# Altium PCB STM32F302VC_EVM.PcbDoc (part 17 of 19)
Units mil, origin at the board's own origin, x right, y up, seen from the top; angles counter-clockwise.
Board outline 3937.01 x 3937.01 mil, 2 copper layers (Top Layer, Bottom Layer); 117 components, 166 nets, 602 pads, 373 vias.
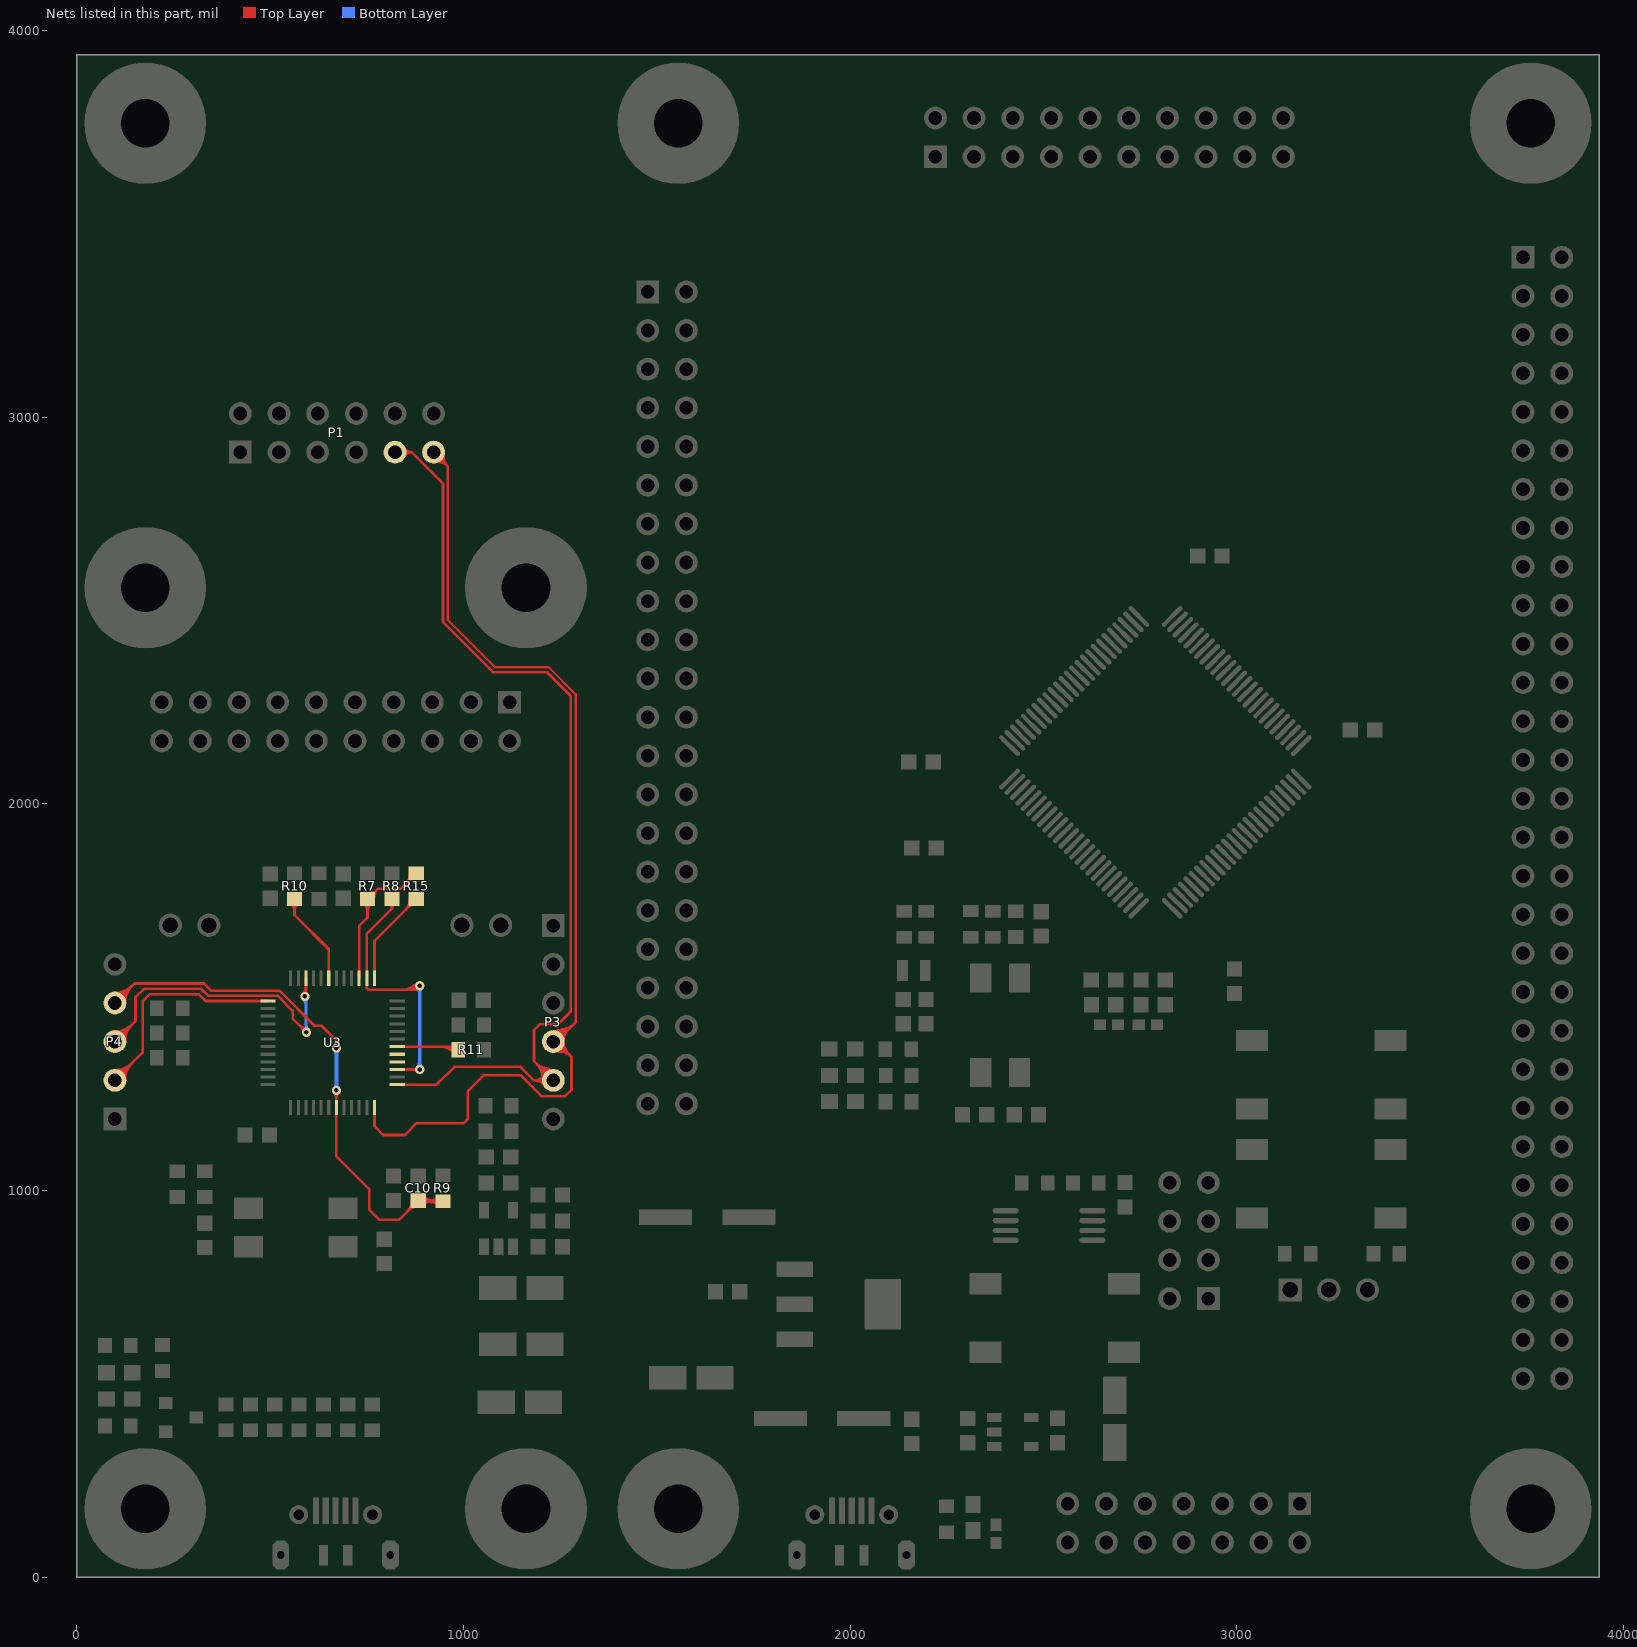
[diagram p17: the nets of this part, all layers, seen from the top]

## Via types
v1: diameter 23.62, hole 11.81, Top Layer to Bottom Layer, tented both sides, 372 vias
v2: diameter 50, hole 28, Top Layer to Bottom Layer, tented both sides, 1 vias

## Nets (pads, with @x,y where several pads share a name; then routed paths per layer and width w, separated by ;. In a path a pad name is that pad's centre, name@x,y a point inside that pad or via, vN(x,y) a via of type N, cw(c..) or ccw(c..) an arc to the next point about the centre after c; other vN are vias at no path point) (continued)
STLK_RX: P1.9 P3.5 U3.13 | length 4046.1
  Top Layer w7: P1.9@822.83,2909.45 865.83,2909.45 ; U3.13@828.74,1273.62 930.12,1273.62 976.38,1319.88 1147.64,1319.88 1182.48,1285.04 ; P1.9@839.69,2900.63 cw(c854.26,2893.01) 854.26,2909.45 ; P1.9@839.69,2900.63 cw(c854.26,2893.01) 854.26,2909.45 ; P1.9@839.69,2900.63 cw(c854.26,2893.01) 854.26,2909.45 ; P1.9@839.69,2918.27 ccw(c854.26,2925.89) 854.26,2909.45 ; P1.9@839.69,2918.27 ccw(c854.26,2925.89) 854.26,2909.45 ; P1.9@839.69,2918.27 ccw(c854.26,2925.89) 854.26,2909.45 ; P1.9@845.9,2897.38 cw(c865.83,2886.96) 865.83,2909.45 ; P1.9@845.9,2897.38 cw(c865.83,2886.96) 865.83,2909.45 ; P1.9@845.9,2897.38 cw(c865.83,2886.96) 865.83,2909.45 ; P1.9@845.9,2921.51 ccw(c865.83,2931.94) 865.83,2909.45 ; P1.9@845.9,2921.51 ccw(c865.83,2931.94) 865.83,2909.45 ; P1.9@845.9,2921.51 ccw(c865.83,2931.94) 865.83,2909.45 ; 865.83,2909.45 946.85,2828.43 946.85,2470.22 1076.52,2340.55 1215.3,2340.55 1277.4,2278.45 1277.4,1462.44 1245.08,1430.12 1197.83,1430.12 1182.28,1414.57 1182.28,1335.04 P3.5@1232.28,1285.04 1182.48,1285.04 ; 1182.48,1285.04 cw(c1182.48,1250.41) P3.5@1210.91,1270.18 ; 1182.48,1285.04 ccw(c1182.48,1319.67) P3.5@1210.91,1299.9 ; 1182.48,1285.04 ccw(c1182.48,1319.67) P3.5@1210.91,1299.9 ; 1182.48,1285.04 cw(c1182.48,1250.41) P3.5@1210.91,1270.18 ; 1182.48,1285.04 ccw(c1182.48,1319.67) P3.5@1210.91,1299.9 ; 1182.48,1285.04 cw(c1182.48,1250.41) P3.5@1210.91,1270.18 ; 1187.85,1329.47 cw(c1143.42,1285.04) P3.5@1206.26,1285.04 ; 1187.85,1329.47 ccw(c1232.28,1373.9) P3.5@1232.28,1311.07 ; 1187.85,1329.47 ccw(c1232.28,1373.9) P3.5@1232.28,1311.07 ; 1187.85,1329.47 cw(c1143.42,1285.04) P3.5@1206.26,1285.04 ; 1187.85,1329.47 ccw(c1232.28,1373.9) P3.5@1232.28,1311.07 ; 1187.85,1329.47 cw(c1143.42,1285.04) P3.5@1206.26,1285.04 ; 1195.88,1285.04 cw(c1195.88,1259.72) P3.5@1216.66,1274.18 ; 1195.88,1285.04 ccw(c1195.88,1310.36) P3.5@1216.66,1295.9 ; 1195.88,1285.04 ccw(c1195.88,1310.36) P3.5@1216.66,1295.9 ; 1195.88,1285.04 cw(c1195.88,1259.72) P3.5@1216.66,1274.18 ; 1195.88,1285.04 ccw(c1195.88,1310.36) P3.5@1216.66,1295.9 ; 1195.88,1285.04 cw(c1195.88,1259.72) P3.5@1216.66,1274.18 ; 1199.8,1317.52 cw(c1167.32,1285.04) P3.5@1213.26,1285.04 ; 1199.8,1317.52 ccw(c1232.28,1350) P3.5@1232.28,1304.07 ; 1199.8,1317.52 ccw(c1232.28,1350) P3.5@1232.28,1304.07 ; 1199.8,1317.52 cw(c1167.32,1285.04) P3.5@1213.26,1285.04 ; 1199.8,1317.52 ccw(c1232.28,1350) P3.5@1232.28,1304.07 ; 1199.8,1317.52 cw(c1167.32,1285.04) P3.5@1213.26,1285.04 ; 1202.58,1319.03 cw(c1191.21,1276.63) P3.5@1234.22,1285.44 ; 1202.58,1319.03 cw(c1191.21,1276.63) P3.5@1234.22,1285.44 ; 1202.58,1319.03 cw(c1191.21,1276.63) P3.5@1234.22,1285.44 ; 1206.22,1311.05 cw(c1198.86,1283.59) P3.5@1227.26,1284.82 ; 1206.22,1311.05 cw(c1198.86,1283.59) P3.5@1227.26,1284.82 ; 1206.22,1311.05 cw(c1198.86,1283.59) P3.5@1227.26,1284.82 ; 1206.27,1311.1 ccw(c1233.73,1318.46) P3.5@1232.5,1290.06 ; 1206.27,1311.1 ccw(c1233.73,1318.46) P3.5@1232.5,1290.06 ; 1206.27,1311.1 ccw(c1233.73,1318.46) P3.5@1232.5,1290.06 ; 1213.52,1316.1 cw(c1203.62,1279.17) P3.5@1241.07,1286.84 ; 1213.52,1316.1 cw(c1203.62,1279.17) P3.5@1241.07,1286.84 ; 1213.52,1316.1 cw(c1203.62,1279.17) P3.5@1241.07,1286.84
STLK_TX: P1.11 P3.4 U3.12 | length 5361.9
  Top Layer w6: P1.11@922.83,2909.45 959.35,2872.94 ; P3.4@1232.28,1385.04 1240.16,1385.04 1289.9,1434.78 ; P1.11@910.88,2899.63 ccw(c949.62,2931.44) 944.72,2881.55 ; P1.11@910.88,2899.63 ccw(c949.62,2931.44) 944.72,2881.55 ; P1.11@910.88,2899.63 ccw(c949.62,2931.44) 944.72,2881.55 ; P1.11@926.18,2889.2 cw(c930.85,2860.96) 951.09,2881.2 ; P1.11@926.18,2889.2 cw(c930.85,2860.96) 951.09,2881.2 ; P1.11@926.18,2889.2 cw(c930.85,2860.96) 951.09,2881.2 ; P1.11@927.16,2883.28 cw(c933.19,2846.78) 959.35,2872.94 ; P1.11@927.16,2883.28 cw(c933.19,2846.78) 959.35,2872.94 ; P1.11@927.16,2883.28 cw(c933.19,2846.78) 959.35,2872.94 ; P1.11@932.65,2921.41 cw(c900.84,2882.66) 950.73,2887.57 ; P1.11@932.65,2921.41 cw(c900.84,2882.66) 950.73,2887.57 ; P1.11@932.65,2921.41 cw(c900.84,2882.66) 950.73,2887.57 ; P1.11@943.09,2906.1 ccw(c971.33,2901.43) 951.09,2881.2 ; P1.11@943.09,2906.1 ccw(c971.33,2901.43) 951.09,2881.2 ; P1.11@943.09,2906.1 ccw(c971.33,2901.43) 951.09,2881.2 ; P1.11@949.01,2905.12 ccw(c985.5,2899.09) 959.35,2872.94 ; P1.11@949.01,2905.12 ccw(c985.5,2899.09) 959.35,2872.94 ; P1.11@949.01,2905.12 ccw(c985.5,2899.09) 959.35,2872.94 ; 959.35,2872.94 959.35,2475.4 1081.7,2353.05 1220.48,2353.05 1289.9,2283.63 1289.9,1434.78 ; P3.4@1217.62,1389.96 cw(c1253.22,1378.01) 1244.04,1414.43 ; P3.4@1217.62,1389.96 cw(c1253.22,1378.01) 1244.04,1414.43 ; P3.4@1217.62,1389.96 cw(c1253.22,1378.01) 1244.04,1414.43 ; P3.4@1223.3,1388.05 cw(c1265.59,1373.86) 1254.69,1417.11 ; P3.4@1223.3,1388.05 cw(c1265.59,1373.86) 1254.69,1417.11 ; P3.4@1223.3,1388.05 cw(c1265.59,1373.86) 1254.69,1417.11 ; P3.4@1228.9,1385.83 cw(c1261.67,1378.21) 1253.44,1410.83 ; P3.4@1228.9,1385.83 cw(c1261.67,1378.21) 1253.44,1410.83 ; P3.4@1228.9,1385.83 cw(c1261.67,1378.21) 1253.44,1410.83 ; P3.4@1228.99,1386.14 cw(c1277.97,1369.7) 1265.34,1419.8 ; P3.4@1228.99,1386.14 cw(c1277.97,1369.7) 1265.34,1419.8 ; P3.4@1228.99,1386.14 cw(c1277.97,1369.7) 1265.34,1419.8 ; P3.4@1232.41,1393.57 ccw(c1232.96,1431.5) 1259.79,1404.67 ; P3.4@1232.41,1393.57 ccw(c1232.96,1431.5) 1259.79,1404.67 ; P3.4@1232.41,1393.57 ccw(c1232.96,1431.5) 1259.79,1404.67 ; P3.4@1232.5,1399.57 ccw(c1233.25,1451.28) 1269.83,1414.71 ; P3.4@1232.5,1399.57 ccw(c1233.25,1451.28) 1269.83,1414.71 ; P3.4@1232.5,1399.57 ccw(c1233.25,1451.28) 1269.83,1414.71 ; P3.4@1232.58,1405.56 ccw(c1233.54,1471.06) 1279.86,1424.74 ; P3.4@1232.58,1405.56 ccw(c1233.54,1471.06) 1279.86,1424.74 ; P3.4@1232.58,1405.56 ccw(c1233.54,1471.06) 1279.86,1424.74 ; P3.4@1232.67,1411.56 ccw(c1233.83,1490.84) 1289.89,1434.78 ; P3.4@1232.67,1411.56 ccw(c1233.83,1490.84) 1289.89,1434.78 ; P3.4@1232.67,1411.56 ccw(c1233.83,1490.84) 1289.89,1434.78 ; P3.4@1234.75,1384.47 cw(c1272.44,1375.7) 1262.98,1413.23 ; P3.4@1234.75,1384.47 cw(c1272.44,1375.7) 1262.98,1413.23 ; P3.4@1234.75,1384.47 cw(c1272.44,1375.7) 1262.98,1413.23 ; P3.4@1240.78,1384.36 cw(c1265.4,1382.4) 1259.36,1406.34 ; P3.4@1240.78,1384.36 cw(c1265.4,1382.4) 1259.36,1406.34 ; P3.4@1240.78,1384.36 cw(c1265.4,1382.4) 1259.36,1406.34 ; P3.4@1245.88,1407.82 ccw(c1254.15,1421.67) 1258.1,1406.02 ; P3.4@1245.88,1407.82 ccw(c1254.15,1421.67) 1258.1,1406.02 ; P3.4@1245.88,1407.82 ccw(c1254.15,1421.67) 1258.1,1406.02 ; P3.4@1252.81,1385.04 cw(c1283.36,1385.04) 1261.76,1406.64 ; P3.4@1252.81,1385.04 cw(c1283.36,1385.04) 1261.76,1406.64 ; P3.4@1252.81,1385.04 cw(c1283.36,1385.04) 1261.76,1406.64 ; P3.4@1258.81,1385.04 cw(c1303.84,1385.04) 1272,1416.88 ; P3.4@1258.81,1385.04 cw(c1303.84,1385.04) 1272,1416.88 ; P3.4@1258.81,1385.04 cw(c1303.84,1385.04) 1272,1416.88
  Top Layer w7: U3.12@769.68,1214.57 769.68,1166.34 792.32,1143.7 848.43,1143.7 878.94,1174.21 1000.98,1174.21 1010.83,1184.06 1010.83,1255.91 1053.15,1298.23 1147.64,1298.23 1201.77,1244.09 1262.8,1244.09 1279.19,1260.48 1279.19,1346.01 ; P3.4@1240.16,1385.04 1279.19,1346.01 ; P3.4@1220.04,1374.78 ccw(c1256.28,1405.14) 1252.12,1358.05 ; P3.4@1220.04,1374.78 ccw(c1256.28,1405.14) 1252.12,1358.05 ; P3.4@1220.04,1374.78 ccw(c1256.28,1405.14) 1252.12,1358.05 ; P3.4@1234.36,1373.19 cw(c1239.43,1344.33) 1260.15,1365.05 ; P3.4@1234.36,1373.19 cw(c1239.43,1344.33) 1260.15,1365.05 ; P3.4@1234.36,1373.19 cw(c1239.43,1344.33) 1260.15,1365.05 ; P3.4@1235.57,1366.3 cw(c1242.27,1328.13) 1269.66,1355.53 ; P3.4@1235.57,1366.3 cw(c1242.27,1328.13) 1269.66,1355.53 ; P3.4@1235.57,1366.3 cw(c1242.27,1328.13) 1269.66,1355.53 ; P3.4@1236.78,1359.4 cw(c1245.11,1311.94) 1279.18,1346.01 ; P3.4@1236.78,1359.4 cw(c1245.11,1311.94) 1279.18,1346.01 ; P3.4@1236.78,1359.4 cw(c1245.11,1311.94) 1279.18,1346.01 ; P3.4@1251.31,1385.04 ccw(c1278.24,1385.04) 1259.2,1366 ; P3.4@1251.31,1385.04 ccw(c1278.24,1385.04) 1259.2,1366 ; P3.4@1251.31,1385.04 ccw(c1278.24,1385.04) 1259.2,1366 ; P3.4@1258.31,1385.04 ccw(c1302.14,1385.04) 1271.15,1354.05 ; P3.4@1258.31,1385.04 ccw(c1302.14,1385.04) 1271.15,1354.05 ; P3.4@1258.31,1385.04 ccw(c1302.14,1385.04) 1271.15,1354.05
STM_JTCK: P4.2 U3.37 | length 1300.8
  Top Layer w7: P4.2@98.43,1285.04 170.28,1356.89 170.28,1488.56 189.46,1507.75 314.96,1507.75 332.55,1490.16 U3.37@494.09,1490.16 ; P4.2@98.21,1290.06 ccw(c96.98,1318.46) 124.44,1311.1 ; P4.2@98.21,1290.06 ccw(c96.98,1318.46) 124.44,1311.1 ; P4.2@98.21,1290.06 ccw(c96.98,1318.46) 124.44,1311.1 ; P4.2@98.43,1304.07 ccw(c98.43,1350) 130.91,1317.52 ; P4.2@98.43,1304.07 ccw(c98.43,1350) 130.91,1317.52 ; P4.2@98.43,1304.07 ccw(c98.43,1350) 130.91,1317.52 ; P4.2@98.43,1311.07 ccw(c98.43,1373.9) 142.86,1329.47 ; P4.2@98.43,1311.07 ccw(c98.43,1373.9) 142.86,1329.47 ; P4.2@98.43,1311.07 ccw(c98.43,1373.9) 142.86,1329.47 ; P4.2@103.45,1284.82 cw(c131.85,1283.59) 124.49,1311.05 ; P4.2@103.45,1284.82 cw(c131.85,1283.59) 124.49,1311.05 ; P4.2@103.45,1284.82 cw(c131.85,1283.59) 124.49,1311.05 ; P4.2@117.45,1285.04 cw(c163.39,1285.04) 130.91,1317.52 ; P4.2@117.45,1285.04 cw(c163.39,1285.04) 130.91,1317.52 ; P4.2@117.45,1285.04 cw(c163.39,1285.04) 130.91,1317.52 ; P4.2@124.45,1285.04 cw(c187.29,1285.04) 142.86,1329.47 ; P4.2@124.45,1285.04 cw(c187.29,1285.04) 142.86,1329.47 ; P4.2@124.45,1285.04 cw(c187.29,1285.04) 142.86,1329.47
STM_JTMS: P4.3 U3.34 | length 1999.2
  Top Layer w7: P4.3@98.43,1385.04 151.57,1438.19 151.57,1500 173.23,1521.65 321.85,1521.65 339.57,1503.94 518.7,1503.94 558.07,1464.57 558.07,1445.25 v1(593.87,1409.45) ; v1(589.99,1501.89) 590.47,1501.89 592.52,1503.94 U3.34@592.52,1549.21 ; P4.3@98.21,1390.06 ccw(c96.98,1418.46) 124.44,1411.1 ; P4.3@98.21,1390.06 ccw(c96.98,1418.46) 124.44,1411.1 ; P4.3@98.21,1390.06 ccw(c96.98,1418.46) 124.44,1411.1 ; P4.3@98.43,1404.07 ccw(c98.43,1450) 130.91,1417.52 ; P4.3@98.43,1404.07 ccw(c98.43,1450) 130.91,1417.52 ; P4.3@98.43,1404.07 ccw(c98.43,1450) 130.91,1417.52 ; P4.3@98.43,1411.07 ccw(c98.43,1473.9) 142.86,1429.47 ; P4.3@98.43,1411.07 ccw(c98.43,1473.9) 142.86,1429.47 ; P4.3@98.43,1411.07 ccw(c98.43,1473.9) 142.86,1429.47 ; P4.3@103.45,1384.82 cw(c131.85,1383.59) 124.49,1411.05 ; P4.3@103.45,1384.82 cw(c131.85,1383.59) 124.49,1411.05 ; P4.3@103.45,1384.82 cw(c131.85,1383.59) 124.49,1411.05 ; P4.3@117.45,1385.04 cw(c163.39,1385.04) 130.91,1417.52 ; P4.3@117.45,1385.04 cw(c163.39,1385.04) 130.91,1417.52 ; P4.3@117.45,1385.04 cw(c163.39,1385.04) 130.91,1417.52 ; P4.3@124.45,1385.04 cw(c187.29,1385.04) 142.86,1429.47 ; P4.3@124.45,1385.04 cw(c187.29,1385.04) 142.86,1429.47 ; P4.3@124.45,1385.04 cw(c187.29,1385.04) 142.86,1429.47 ; 579.68,1423.64 cw(c565.49,1409.45) v1@585.56,1409.45 ; 579.68,1423.64 ccw(c593.87,1437.82) v1@593.87,1417.76 ; 579.68,1423.64 ccw(c593.87,1437.82) v1@593.87,1417.76 ; 579.68,1423.64 cw(c565.49,1409.45) v1@585.56,1409.45 ; 579.68,1423.64 ccw(c593.87,1437.82) v1@593.87,1417.76 ; 579.68,1423.64 cw(c565.49,1409.45) v1@585.56,1409.45 ; 581.35,1421.11 cw(c577.31,1406.06) v1@592.58,1409.19 ; 581.35,1421.11 cw(c577.31,1406.06) v1@592.58,1409.19 ; 581.35,1421.11 cw(c577.31,1406.06) v1@592.58,1409.19 ; 582.2,1421.97 ccw(c597.26,1426) v1@594.13,1410.73 ; 582.2,1421.97 ccw(c597.26,1426) v1@594.13,1410.73 ; 582.2,1421.97 ccw(c597.26,1426) v1@594.13,1410.73 ; v1@584.11,1507.77 ccw(c563.8,1528.07) 592.52,1528.07 ; v1@584.11,1507.77 ccw(c563.8,1528.07) 592.52,1528.07 ; v1@584.11,1507.77 ccw(c563.8,1528.07) 592.52,1528.07 ; 592.52,1515.84 ccw(c603.93,1515.84) v1@595.86,1507.77 ; 592.52,1515.84 ccw(c603.93,1515.84) v1@595.86,1507.77 ; 592.52,1515.84 ccw(c603.93,1515.84) v1@595.86,1507.77
  Bottom Layer w7: v1(589.99,1501.89) 590.47,1501.89 592.52,1499.84 592.52,1410.8 v1(593.87,1409.45) ; v1@584.11,1496.01 cw(c563.8,1475.71) 592.52,1475.71 ; v1@584.11,1496.01 cw(c563.8,1475.71) 592.52,1475.71 ; v1@584.11,1496.01 cw(c563.8,1475.71) 592.52,1475.71 ; v1@587.99,1415.33 ccw(c577.06,1426.26) 592.52,1426.26 ; v1@587.99,1415.33 ccw(c577.06,1426.26) 592.52,1426.26 ; v1@587.99,1415.33 ccw(c577.06,1426.26) 592.52,1426.26 ; 592.52,1432.77 ccw(c617.19,1432.77) v1@599.75,1415.33 ; 592.52,1432.77 ccw(c617.19,1432.77) v1@599.75,1415.33 ; 592.52,1432.77 ccw(c617.19,1432.77) v1@599.75,1415.33 ; 592.52,1487.94 cw(c603.93,1487.94) v1@595.86,1496.01 ; 592.52,1487.94 cw(c603.93,1487.94) v1@595.86,1496.01 ; 592.52,1487.94 cw(c603.93,1487.94) v1@595.86,1496.01
STM_RST: C10.2 P4.4 R9.1 U3.7 | length 3020.8
  Top Layer w7: P4.4@98.43,1485.04 149.02,1535.63 328.54,1535.63 347.24,1516.94 524.4,1516.94 615.16,1426.18 632.87,1426.18 671.26,1387.8 ; v1(671.26,1258.86) U3.7@671.26,1214.57 671.26,1088.46 755.91,1003.81 755.91,950.79 782.48,924.21 832.68,924.21 C10.2@882.87,974.41 ; v1(671.26,1368.11) 671.26,1387.8 ; P4.4@98.21,1490.06 ccw(c96.98,1518.46) 124.44,1511.1 ; P4.4@98.21,1490.06 ccw(c96.98,1518.46) 124.44,1511.1 ; P4.4@98.21,1490.06 ccw(c96.98,1518.46) 124.44,1511.1 ; P4.4@98.43,1504.07 ccw(c98.43,1550) 130.91,1517.52 ; P4.4@98.43,1504.07 ccw(c98.43,1550) 130.91,1517.52 ; P4.4@98.43,1504.07 ccw(c98.43,1550) 130.91,1517.52 ; P4.4@98.43,1511.07 ccw(c98.43,1573.9) 142.86,1529.47 ; P4.4@98.43,1511.07 ccw(c98.43,1573.9) 142.86,1529.47 ; P4.4@98.43,1511.07 ccw(c98.43,1573.9) 142.86,1529.47 ; P4.4@103.45,1484.82 cw(c131.85,1483.59) 124.49,1511.05 ; P4.4@103.45,1484.82 cw(c131.85,1483.59) 124.49,1511.05 ; P4.4@103.45,1484.82 cw(c131.85,1483.59) 124.49,1511.05 ; P4.4@117.45,1485.04 cw(c163.39,1485.04) 130.91,1517.52 ; P4.4@117.45,1485.04 cw(c163.39,1485.04) 130.91,1517.52 ; P4.4@117.45,1485.04 cw(c163.39,1485.04) 130.91,1517.52 ; P4.4@124.45,1485.04 cw(c187.29,1485.04) 142.86,1529.47 ; P4.4@124.45,1485.04 cw(c187.29,1485.04) 142.86,1529.47 ; P4.4@124.45,1485.04 cw(c187.29,1485.04) 142.86,1529.47 ; v1@665.38,1252.98 cw(c651.2,1238.79) 671.26,1238.79 ; v1@665.38,1252.98 cw(c651.2,1238.79) 671.26,1238.79 ; v1@665.38,1252.98 cw(c651.2,1238.79) 671.26,1238.79 ; v1@665.46,1374.07 ccw(c652.11,1387.79) 671.26,1387.79 ; v1@665.46,1374.07 ccw(c652.11,1387.79) 671.26,1387.79 ; v1@665.46,1374.07 ccw(c652.11,1387.79) 671.26,1387.79 ; 671.26,1238.79 cw(c691.32,1238.79) v1@677.14,1252.98 ; 671.26,1238.79 cw(c691.32,1238.79) v1@677.14,1252.98 ; 671.26,1238.79 cw(c691.32,1238.79) v1@677.14,1252.98 ; 671.26,1387.79 ccw(c690.41,1387.79) v1@677.06,1374.07 ; 671.26,1387.79 ccw(c690.41,1387.79) v1@677.06,1374.07 ; 671.26,1387.79 ccw(c690.41,1387.79) v1@677.06,1374.07 ; 855.24,946.78 cw(c882.87,919.15) C10.2@882.87,958.22 ; 855.24,946.78 ccw(c827.62,974.41) C10.2@866.69,974.41 ; 855.24,946.78 ccw(c827.62,974.41) C10.2@866.69,974.41 ; 855.24,946.78 cw(c882.87,919.15) C10.2@882.87,958.22 ; 855.24,946.78 ccw(c827.62,974.41) C10.2@866.69,974.41 ; 855.24,946.78 cw(c882.87,919.15) C10.2@882.87,958.22 ; C10.2@867.19,958.73 cw(c882.87,943.05) C10.2@882.87,965.22 ; C10.2@867.19,958.73 ccw(c851.51,974.41) C10.2@873.69,974.41 ; C10.2@867.19,958.73 ccw(c851.51,974.41) C10.2@873.69,974.41 ; C10.2@867.19,958.73 cw(c882.87,943.05) C10.2@882.87,965.22 ; C10.2@867.19,958.73 ccw(c851.51,974.41) C10.2@873.69,974.41 ; C10.2@867.19,958.73 cw(c882.87,943.05) C10.2@882.87,965.22
  Top Layer w10: C10.2@882.87,974.41 884.84,972.44 R9.1@946.85,972.44 ; C10.2@893.26,964.03 cw(c913.57,943.71) 913.57,972.44 ; C10.2@893.26,964.03 cw(c913.57,943.71) 913.57,972.44 ; C10.2@893.26,964.03 cw(c913.57,943.71) 913.57,972.44 ; C10.2@893.26,984.79 ccw(c923.08,1014.61) 923.08,972.44 ; C10.2@893.26,984.79 ccw(c923.08,1014.61) 923.08,972.44 ; C10.2@893.26,984.79 ccw(c923.08,1014.61) 923.08,972.44 ; 914.18,972.44 cw(c914.18,941.74) R9.1@935.89,963.45 ; 914.18,972.44 ccw(c914.18,1003.14) R9.1@935.89,981.43 ; 914.18,972.44 ccw(c914.18,1003.14) R9.1@935.89,981.43 ; 914.18,972.44 cw(c914.18,941.74) R9.1@935.89,963.45 ; 914.18,972.44 ccw(c914.18,1003.14) R9.1@935.89,981.43 ; 914.18,972.44 cw(c914.18,941.74) R9.1@935.89,963.45
  Bottom Layer w10: v1(671.26,1258.86) v1(671.26,1368.11) ; v1@666.44,1263.67 ccw(c654.82,1275.3) 671.26,1275.3 ; v1@666.44,1263.67 ccw(c654.82,1275.3) 671.26,1275.3 ; v1@666.44,1263.67 ccw(c654.82,1275.3) 671.26,1275.3 ; v1@666.44,1363.29 cw(c654.82,1351.67) 671.26,1351.67 ; v1@666.44,1363.29 cw(c654.82,1351.67) 671.26,1351.67 ; v1@666.44,1363.29 cw(c654.82,1351.67) 671.26,1351.67 ; 671.26,1275.3 ccw(c687.7,1275.3) v1@676.08,1263.67 ; 671.26,1275.3 ccw(c687.7,1275.3) v1@676.08,1263.67 ; 671.26,1275.3 ccw(c687.7,1275.3) v1@676.08,1263.67 ; 671.26,1351.67 cw(c687.7,1351.67) v1@676.08,1363.29 ; 671.26,1351.67 cw(c687.7,1351.67) v1@676.08,1363.29 ; 671.26,1351.67 cw(c687.7,1351.67) v1@676.08,1363.29
T_JTCK: R8.1 U3.15 U3.26 | length 1555.4
  Top Layer w7: R8.1@814.96,1753.94 814.96,1729.33 ; U3.15@828.74,1312.99 v1(886.81,1312.99) ; v1(886.81,1529.53) 876.19,1518.91 ; R8.1@807.86,1741.62 cw(c800.78,1729.33) 814.96,1729.33 ; R8.1@807.86,1741.62 cw(c800.78,1729.33) 814.96,1729.33 ; R8.1@807.86,1741.62 cw(c800.78,1729.33) 814.96,1729.33 ; 814.96,1729.33 cw(c829.15,1729.33) R8.1@822.06,1741.62 ; 814.96,1729.33 cw(c829.15,1729.33) R8.1@822.06,1741.62 ; 814.96,1729.33 cw(c829.15,1729.33) R8.1@822.06,1741.62 ; 814.96,1729.33 750,1664.37 U3.26@750,1549.21 750,1523.62 754.72,1518.91 876.19,1518.91 ; 841.1,1518.91 ccw(c841.1,1575.24) v1@880.93,1535.4 ; 841.1,1518.91 ccw(c841.1,1575.24) v1@880.93,1535.4 ; 841.1,1518.91 ccw(c841.1,1575.24) v1@880.93,1535.4 ; 858,1518.91 ccw(c858,1558.34) v1@885.88,1530.45 ; 858,1518.91 ccw(c858,1558.34) v1@885.88,1530.45 ; 858,1518.91 ccw(c858,1558.34) v1@885.88,1530.45 ; 859.94,1523.21 cw(c870.59,1504.88) v1@882.24,1522.58 ; 859.94,1523.21 cw(c870.59,1504.88) v1@882.24,1522.58 ; 859.94,1523.21 cw(c870.59,1504.88) v1@882.24,1522.58 ; 866.75,1312.99 cw(c866.75,1292.93) v1@880.93,1307.12 ; 866.75,1312.99 ccw(c866.75,1333.06) v1@880.93,1318.87 ; 866.75,1312.99 ccw(c866.75,1333.06) v1@880.93,1318.87 ; 866.75,1312.99 cw(c866.75,1292.93) v1@880.93,1307.12 ; 866.75,1312.99 ccw(c866.75,1333.06) v1@880.93,1318.87 ; 866.75,1312.99 cw(c866.75,1292.93) v1@880.93,1307.12 ; 868.84,1520.61 cw(c877.54,1505.55) v1@883.81,1521.78 ; 868.84,1520.61 cw(c877.54,1505.55) v1@883.81,1521.78 ; 868.84,1520.61 cw(c877.54,1505.55) v1@883.81,1521.78 ; 869.72,1528.89 cw(c877.54,1515.43) v1@886.09,1528.43 ; 869.72,1528.89 cw(c877.54,1515.43) v1@886.09,1528.43 ; 869.72,1528.89 cw(c877.54,1515.43) v1@886.09,1528.43 ; 871.45,1522.12 ccw(c863.58,1535.75) v1@878.78,1531.68 ; 871.45,1522.12 ccw(c863.58,1535.75) v1@878.78,1531.68 ; 871.45,1522.12 ccw(c863.58,1535.75) v1@878.78,1531.68 ; 874.9,1518.91 ccw(c874.9,1541.44) v1@890.83,1525.5 ; 874.9,1518.91 ccw(c874.9,1541.44) v1@890.83,1525.5 ; 874.9,1518.91 ccw(c874.9,1541.44) v1@890.83,1525.5 ; 876.19,1518.91 cw(c882.85,1512.25) v1@884.95,1521.43 ; 876.19,1518.91 ccw(c869.53,1525.57) v1@878.71,1527.67 ; 876.19,1518.91 ccw(c869.53,1525.57) v1@878.71,1527.67 ; 876.19,1518.91 cw(c882.85,1512.25) v1@884.95,1521.43 ; 876.19,1518.91 ccw(c869.53,1525.57) v1@878.71,1527.67 ; 876.19,1518.91 cw(c882.85,1512.25) v1@884.95,1521.43
  Bottom Layer w10: v1(886.81,1312.99) v1(886.81,1529.53) ; v1@881.99,1317.81 ccw(c870.37,1329.44) 886.81,1329.44 ; v1@881.99,1317.81 ccw(c870.37,1329.44) 886.81,1329.44 ; v1@881.99,1317.81 ccw(c870.37,1329.44) 886.81,1329.44 ; v1@881.99,1524.71 cw(c870.37,1513.08) 886.81,1513.08 ; v1@881.99,1524.71 cw(c870.37,1513.08) 886.81,1513.08 ; v1@881.99,1524.71 cw(c870.37,1513.08) 886.81,1513.08 ; 886.81,1329.44 ccw(c903.25,1329.44) v1@891.63,1317.81 ; 886.81,1329.44 ccw(c903.25,1329.44) v1@891.63,1317.81 ; 886.81,1329.44 ccw(c903.25,1329.44) v1@891.63,1317.81 ; 886.81,1513.08 cw(c903.25,1513.08) v1@891.63,1524.71 ; 886.81,1513.08 cw(c903.25,1513.08) v1@891.63,1524.71 ; 886.81,1513.08 cw(c903.25,1513.08) v1@891.63,1524.71
T_JTDI: U3.17
T_JTDO: U3.16
T_JTMS: R7.1 R15.2 U3.27 | length 1204.1
  Top Layer w6: R7.1@751.97,1753.94 778.69,1780.65 ; R15.2@877.95,1820.87 837.74,1780.65 778.69,1780.65 ; R7.1@750.69,1754.44 cw(c772.04,1751.14) 766.45,1772.01 ; R7.1@750.69,1754.44 cw(c772.04,1751.14) 766.45,1772.01 ; R7.1@750.69,1754.44 cw(c772.04,1751.14) 766.45,1772.01 ; R7.1@753.94,1762.65 ccw(c753.94,1778.94) R7.1@765.46,1767.43 ; R7.1@753.94,1762.65 ccw(c753.94,1778.94) R7.1@765.46,1767.43 ; R7.1@753.94,1762.65 ccw(c753.94,1778.94) R7.1@765.46,1767.43 ; R7.1@753.94,1768.65 ccw(c753.94,1799.43) 775.7,1777.67 ; R7.1@753.94,1768.65 ccw(c753.94,1799.43) 775.7,1777.67 ; R7.1@753.94,1768.65 ccw(c753.94,1799.43) 775.7,1777.67 ; R7.1@755.08,1750.86 ccw(c745.69,1776.16) 772.06,1770.43 ; R7.1@755.08,1750.86 ccw(c745.69,1776.16) 772.06,1770.43 ; R7.1@755.08,1750.86 ccw(c745.69,1776.16) 772.06,1770.43 ; R7.1@762.64,1754.36 cw(c784.75,1755.42) R7.1@769.1,1771.07 ; R7.1@762.64,1754.36 cw(c784.75,1755.42) R7.1@769.1,1771.07 ; R7.1@762.64,1754.36 cw(c784.75,1755.42) R7.1@769.1,1771.07 ; R7.1@768.64,1754.64 cw(c803.04,1756.3) 778.68,1780.65 ; R7.1@768.64,1754.64 cw(c803.04,1756.3) 778.68,1780.65 ; R7.1@768.64,1754.64 cw(c803.04,1756.3) 778.68,1780.65 ; 849.47,1792.38 ccw(c820.99,1820.87) R15.2@861.27,1820.87 ; 849.47,1792.38 ccw(c820.99,1820.87) R15.2@861.27,1820.87 ; 849.47,1792.38 ccw(c820.99,1820.87) R15.2@861.27,1820.87 ; 854.22,1797.14 cw(c875.98,1775.37) R15.2@875.98,1806.15 ; 854.22,1797.14 cw(c875.98,1775.37) R15.2@875.98,1806.15 ; 854.22,1797.14 cw(c875.98,1775.37) R15.2@875.98,1806.15 ; 859.71,1802.63 ccw(c841.47,1820.87) R15.2@867.27,1820.87 ; 859.71,1802.63 ccw(c841.47,1820.87) R15.2@867.27,1820.87 ; 859.71,1802.63 ccw(c841.47,1820.87) R15.2@867.27,1820.87 ; R15.2@864.46,1807.38 cw(c875.98,1795.86) R15.2@875.98,1812.15 ; R15.2@864.46,1807.38 cw(c875.98,1795.86) R15.2@875.98,1812.15 ; R15.2@864.46,1807.38 cw(c875.98,1795.86) R15.2@875.98,1812.15
  Top Layer w7: U3.27@730.31,1549.21 730.31,1684.05 751.97,1705.71 R7.1@751.97,1753.94 ; R7.1@741.92,1743.88 cw(c717.65,1719.62) 751.97,1719.62 ; R7.1@741.92,1743.88 cw(c717.65,1719.62) 751.97,1719.62 ; R7.1@741.92,1743.88 cw(c717.65,1719.62) 751.97,1719.62 ; 751.97,1719.62 cw(c786.29,1719.62) R7.1@762.02,1743.88 ; 751.97,1719.62 cw(c786.29,1719.62) R7.1@762.02,1743.88 ; 751.97,1719.62 cw(c786.29,1719.62) R7.1@762.02,1743.88
T_NRST: R11.1 U3.18 | length 411
  Top Layer w7: U3.18@828.74,1372.05 978.35,1372.05 R11.1@986.22,1364.17 ; 937.64,1372.05 cw(c937.64,1317.56) R11.1@976.17,1356.09 ; 937.64,1372.05 cw(c937.64,1317.56) R11.1@976.17,1356.09 ; 937.64,1372.05 cw(c937.64,1317.56) R11.1@976.17,1356.09 ; 954.54,1372.05 cw(c954.54,1334.46) R11.1@981.12,1361.04 ; 954.54,1372.05 cw(c954.54,1334.46) R11.1@981.12,1361.04 ; 954.54,1372.05 cw(c954.54,1334.46) R11.1@981.12,1361.04 ; 966.16,1372.05 ccw(c966.16,1386.21) R11.1@976.17,1376.19 ; 966.16,1372.05 ccw(c966.16,1386.21) R11.1@976.17,1376.19 ; 966.16,1372.05 ccw(c966.16,1386.21) R11.1@976.17,1376.19
T_SWDIO_IN: R15.1 U3.25 | length 694.6
  Top Layer w7: U3.25@769.68,1549.21 769.68,1645.67 R15.1@877.95,1753.94 ; 850.32,1726.31 ccw(c822.69,1753.94) R15.1@861.77,1753.94 ; 850.32,1726.31 ccw(c822.69,1753.94) R15.1@861.77,1753.94 ; 850.32,1726.31 ccw(c822.69,1753.94) R15.1@861.77,1753.94 ; 855.08,1731.06 cw(c875.98,1710.15) R15.1@875.98,1739.72 ; 855.08,1731.06 cw(c875.98,1710.15) R15.1@875.98,1739.72 ; 855.08,1731.06 cw(c875.98,1710.15) R15.1@875.98,1739.72 ; 856.56,1734.5 cw(c882.7,1727.5) R15.1@876.04,1753.73 ; 856.56,1734.5 cw(c882.7,1727.5) R15.1@876.04,1753.73 ; 856.56,1734.5 cw(c882.7,1727.5) R15.1@876.04,1753.73 ; 858.92,1735.15 ccw(c852.94,1757.45) R15.1@875.77,1753.97 ; 858.92,1735.15 ccw(c852.94,1757.45) R15.1@875.77,1753.97 ; 858.92,1735.15 ccw(c852.94,1757.45) R15.1@875.77,1753.97 ; R15.1@859.65,1746.04 cw(c879.33,1740.77) R15.1@874.31,1760.51 ; R15.1@859.65,1746.04 cw(c879.33,1740.77) R15.1@874.31,1760.51 ; R15.1@859.65,1746.04 cw(c879.33,1740.77) R15.1@874.31,1760.51 ; R15.1@862.27,1738.26 ccw(c846.59,1753.94) R15.1@868.77,1753.94 ; R15.1@862.27,1738.26 ccw(c846.59,1753.94) R15.1@868.77,1753.94 ; R15.1@862.27,1738.26 ccw(c846.59,1753.94) R15.1@868.77,1753.94
T_SWO: R10.1 U3.31 | length 403.2
  Top Layer w7: R10.1@562.99,1753.94 562.99,1712.6 651.57,1624.02 U3.31@651.57,1549.21 ; R10.1@552.94,1743.88 cw(c528.67,1719.62) 562.99,1719.62 ; R10.1@552.94,1743.88 cw(c528.67,1719.62) 562.99,1719.62 ; R10.1@552.94,1743.88 cw(c528.67,1719.62) 562.99,1719.62 ; 562.99,1719.62 cw(c597.31,1719.62) R10.1@573.04,1743.88 ; 562.99,1719.62 cw(c597.31,1719.62) R10.1@573.04,1743.88 ; 562.99,1719.62 cw(c597.31,1719.62) R10.1@573.04,1743.88